# Altium PCB Mojo.PcbDoc
Units mil, origin at the board's own origin, x right, y up, seen from the top; angles counter-clockwise.
Board outline 1000 x 1000 mil, 2 copper layers (Top Layer, Bottom Layer), stack 61.756 mil thick; 20 components, 10 nets, 57 pads, 23 vias.
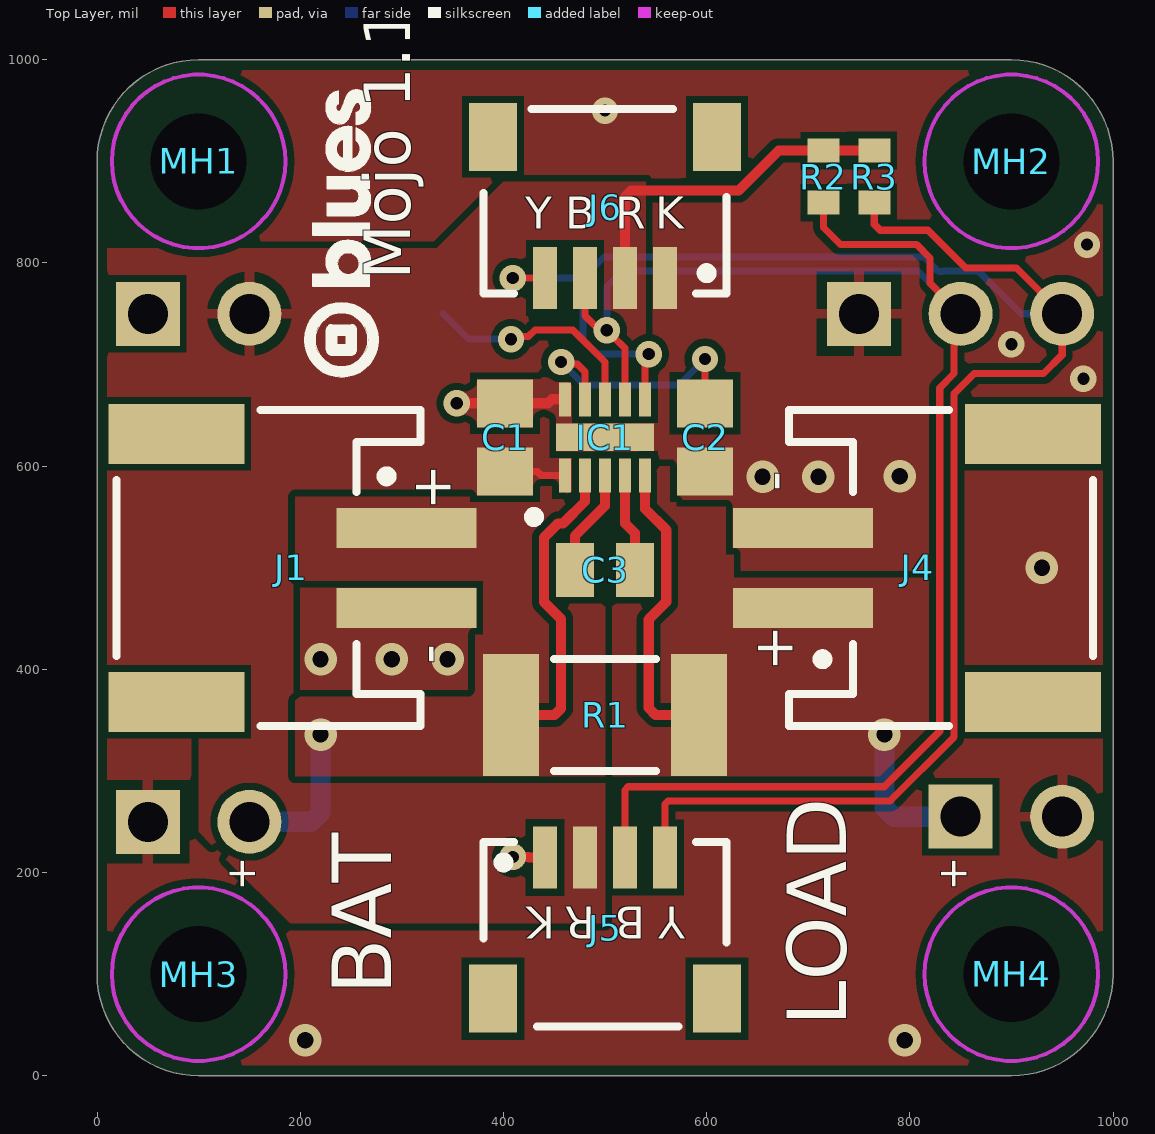
[diagram p0: Top Layer view]
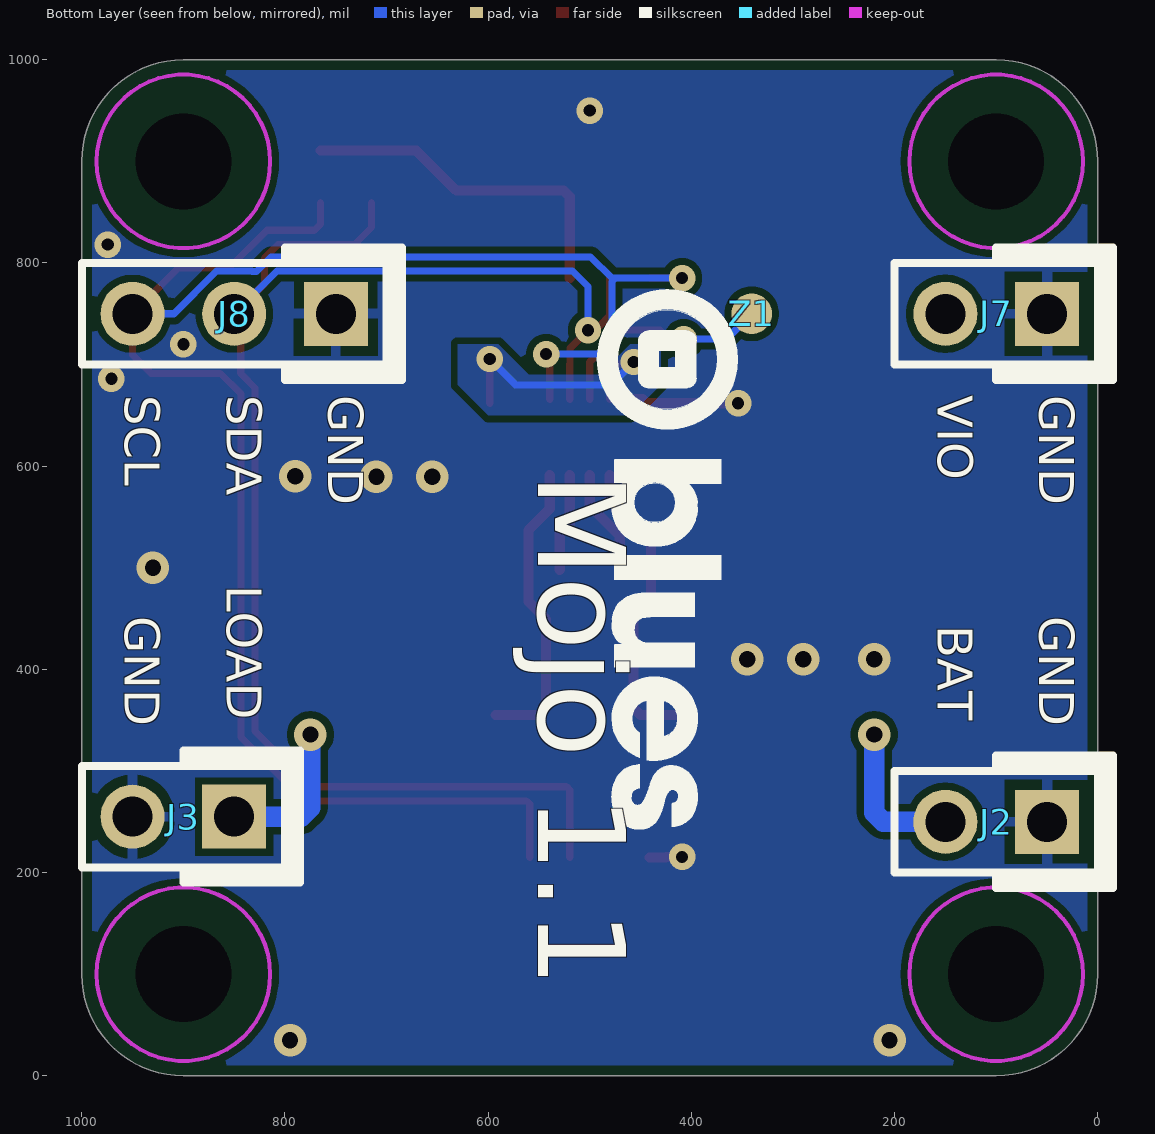
[diagram p1: Bottom Layer view, seen from below]
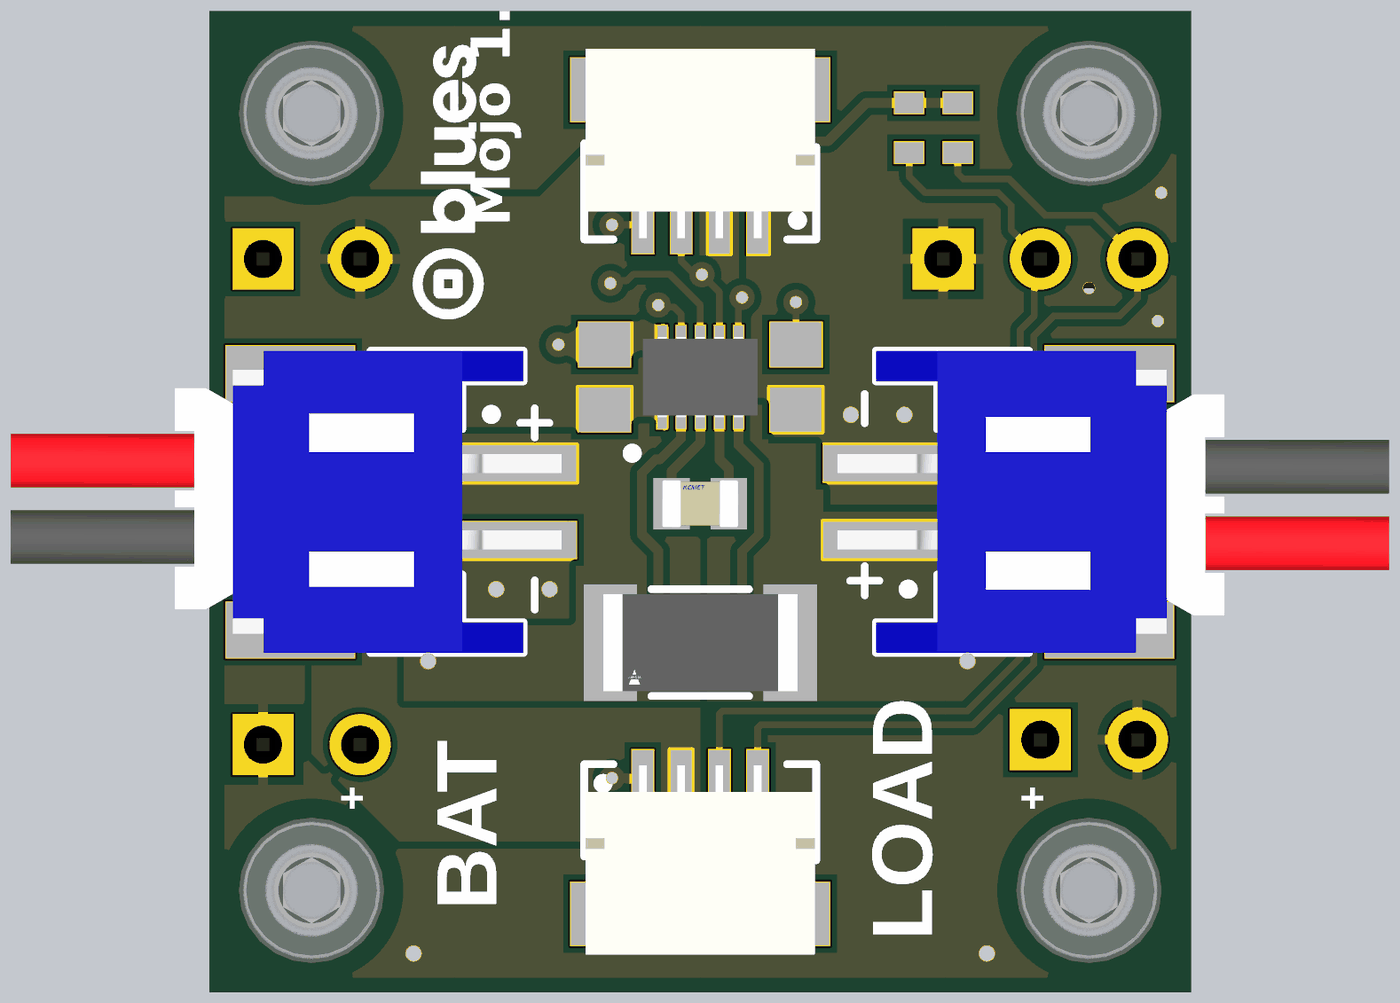
[diagram p2: 3D render of the assembled board from above, using the file's embedded part models]
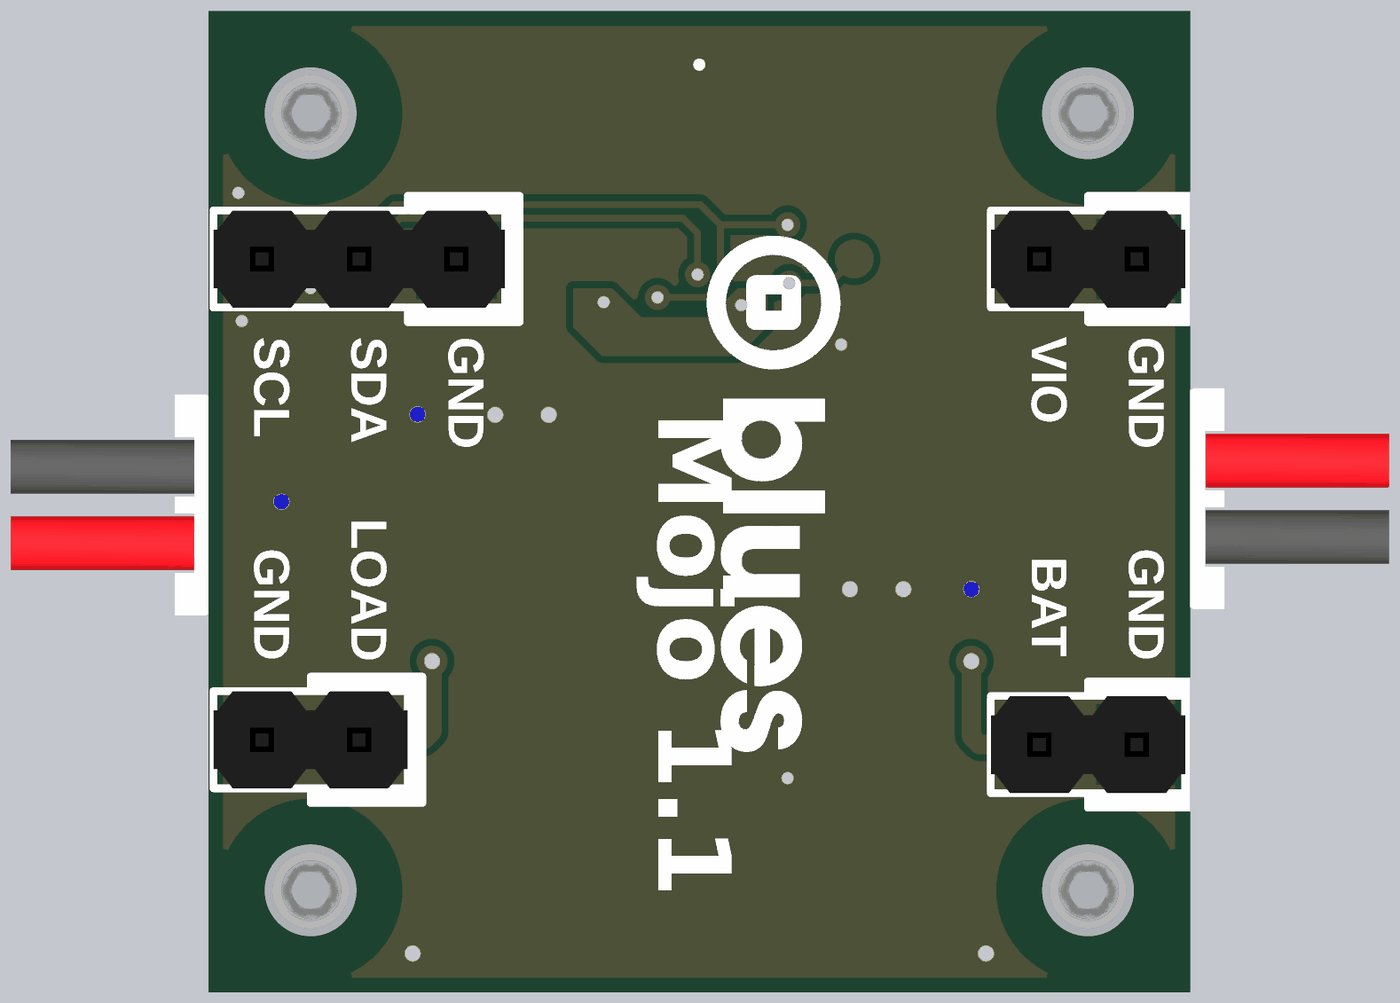
[diagram p3: 3D render of the assembled board from below, using the file's embedded part models]

## Layer stack, top to bottom
Top Solder: solder mask 1, SM-001, Dk 4
Top Layer: signal copper 1.378
Dielectric 1: core 59, Core-043, Dk 4.3
Bottom Layer: signal copper 1.378
Bottom Solder: solder mask 1, SM-001, Dk 4

## Board outline
0,100 ccw(c100,100) 100,0 900,0 ccw(c900,100) 1000,100 1000,900 ccw(c900,900) 900,1000 100,1000 ccw(c100,900) 0,900

## Design rules (kind name [scope] priority, off if disabled: settings)
AcuteAngle [All] p1: minimum=6.00000000000000E+0001 checktracksonly=FALSE
BoardOutlineClearance BoardOutlineClearance_Silkscreen [OnSilkscreen] p1: gap=0 ignorepadtopadclearanceinfootprint=FALSE except(10: Text-OutlineEdge Text-CavityEdge Text-CutoutEdge Text-SplitBarrior Text-SplitContinuation) // Silkscreen can cross board outline, but text should be within the board.
BoardOutlineClearance [All] p2: gap=10 ignorepadtopadclearanceinfootprint=FALSE
Clearance Clearance_via_to_pad [isvia vs ispad] p1: gap=7 ignorepadtopadclearanceinfootprint=FALSE // Via to pad clearance (for escape)
Clearance [All] p2: gap=7 ignorepadtopadclearanceinfootprint=FALSE
HoleSize [All] p1: absolutevalues=TRUE maxlimit=393.7 minlimit=1 maxpercent=80.000 minpercent=20.000
MinimumAnnularRing [All] p1: minimumring=7
MinimumSolderMaskSliver [All] p1: minsoldermaskwidth=3
PasteMaskExpansion [All] p1: expansion=-0.98
PlaneClearance [All] p1: clearance=10
PlaneConnect [All] p1: planeconnectstyle=Relief reliefexpansion=10 reliefentries=4 reliefconductorwidth=10 reliefairgap=10
PolygonConnect [All] p1: thpad.connectstyle=Relief thpad.reliefconductorwidth=10 thpad.reliefentries=4 thpad.polygonreliefangle="90 Angle" thpad.airgapwidth=10 smdpad.connectstyle=Direct smdpad.reliefconductorwidth=10 smdpad.reliefentries=4 smdpad.polygonreliefangle="90 Angle" smdpad.airgapwidth=10 via.connectstyle=Direct via.reliefconductorwidth=10 via.reliefentries=4 via.polygonreliefangle="90 Angle" via.airgapwidth=10
RoomDefinition Mojo [InComponentClass('Mojo')] p1: confinementstyle=ConfineIn formatcopy=TRUE lockcomponents=FALSE outline -235.2,-10.83 1239.8,-10.83 1239.8,1009.17 -235.2,1009.17
RoutingCorners [All] p1: cornerstyle=45-Degree minsetback=50 maxsetback=100
RoutingVias [All] p1: holewidth=11.81 width=23.62 viastyle="Through Hole" minholewidth=7.87 minwidth=15.75 maxholewidth=15.75 maxwidth=31.5 useviatemplates=TRUE viatemplateguid#1={5F6B056E-F8F0-49D9-86D1-57D17891D3C9} viatemplateguid#2={B8950678-3644-47E3-AB67-55393E763CC1} viatemplatename#1=v66h30 viatemplatename#2=v81h41
SMDEntry [All] p1: side=TRUE corner=TRUE anyangle=FALSE
SMDNeckDown [All] p1: percent=95.000
SMDToCorner [All] p1: distance=40000
SMDToPlane [All] p1 off: distance=1500000
SilkToSilkClearance [All] p1: silktosilkclearance=4
SilkToSolderMaskClearance SilkToSolderMaskNoTextOverVias [IsVia or IsPad vs IsText and IsDesignator] p1: minsilkscreentomaskgap=1 clearancetoexposedcopper=TRUE // Avoid placing designator and other text directly over a via
SilkToSolderMaskClearance [IsPad] p2: minsilkscreentomaskgap=4 clearancetoexposedcopper=TRUE // Avoid silkscreen on pad that can lead to solderability issues
SolderMaskExpansion SolderMaskExpansion_via [isvia] p1: expansion=4 istentingtop=TRUE // Mask vias by default
SolderMaskExpansion [All] p2: expansion=2 istentingtop=FALSE
SupplyNets "Schematic Supply Nets_1" [InNet('GND')] p1: voltage=0.000
SupplyNets "Schematic Supply Nets" [InNet('3V3')] p2: voltage=0.000
UnRoutedNet [All] p1: checkbadconnections=TRUE
Width Width_Power [InNetClass('Power')] p1: maxlimit=50 minlimit=10 preferedwidth=30
Width [All] p2: maxlimit=20 minlimit=7 preferedwidth=10 checkconnectedcopper=TRUE
21 further rules are at their usual default settings.

## Classes and differential pairs
net class R3_Nets: 3V3 SCL
net class R2_Nets: 3V3 SDA
net class J8_Nets: GND NetJ8_1 NetJ8_2 SCL SDA
net class J7_Nets: 3V3 GND NetJ7_1 NetJ7_2
net class J6_Nets: 3V3 GND SCL SDA
net class J4_Nets: GND VLOAD
net class J3_Nets: GND VLOAD
net class J2_Nets: GND VBAT
net class J1_Nets: GND VBAT
net class IC1_Nets: 3V3 GND GPIO NetC2_2 NetC3_1 NetC3_2 SCL SDA VBAT VLOAD
net class C3_Nets: NetC3_1 NetC3_2
net class C2_Nets: GND NetC2_2
net class C1_Nets: 3V3 GND
net class Z1_Nets: GPIO
net class R1_Nets: VBAT VLOAD
net class J5_Nets: 3V3 GND NetJ?_1 NetJ?_2 SCL SDA

## Components (designator, comment, footprint, x,y, rotation, side; value= is the part's Value field where it differs from the comment)
C1 "GRM216R61E105KA12D" CAPC2013X70X45NL10T25 401.57,628.43 r270 top
C2 "GRM216R61E105KA12D" CAPC2013X70X45NL10T25 598.43,628.43 r90 top
C3 "C0805C474K5RACTU" FP-C0805C-DN-MFG 500,498.03 r0 top value="0.47 μF"
IC1 "LTC2959IDDB#TRMPBF" SON50P200X300X80-11N-D 500,628.43 r90 top
J1 "20404" BAT-AF-S2B-PH-SM4 168.54,500 r270 top
J2 "Header 2-Pin, 0.100 in" HEADER_AA_002 50,250 r0 bottom
J3 "Header 2-Pin, 0.100 in" HEADER_AA_002 850,255 r0 bottom
J4 "20404" BAT-AF-S2B-PH-SM4 830.44,500 r90 top
J5 "QWIIC SM04B-SRSS-TB(LF)(SN)" QWIIC_SM04B-SRSS 500,134.88 r180 top
J6 "QWIIC SM04B-SRSS-TB(LF)(SN)" QWIIC_SM04B-SRSS 500,865.12 r0 top
J7 "Header 2-Pin, 0.100 in" HEADER_AA_002 50,750 r0 bottom
J8 "Header 3-Pin, 0.100 in" HEADER_AA_003 750,750 r0 bottom
MH1 "M2" HOLE_2MM 100,900 r0 top
MH2 "M2" HOLE_2MM 900,900 r0 top
MH3 "M2" HOLE_2MM 100,100 r0 top
MH4 "M2" HOLE_2MM 900,100 r0 top
R1 "WSL2010R2500FEA" FP-WSL2010-0_508-MFG 500,355 r180 top
R2 "RC0603FR-0722KL" RESC1608X55X25LL10T15 715,885 r90 top
R3 "RC0603FR-0722KL" RESC1608X55X25LL10T15 765,885 r90 top
Z1 "Test Point" testp_40pad 340.63,750 r180 bottom

## Footprints (in the part's own frame and the unit in brackets; to place one, negate y for a bottom-side part, rotate by r counter-clockwise, add the part's x,y. Pads: shape width x height; smd on the part's side, far side on the other; paste and mask are expansions set on the pad)
BAT-AF-S2B-PH-SM4 [mm] "Battery Connector PH 2POS Adafruit style (JST-S2B-PH-SM4-TB(LF)(SN)_V_1)"
  rect 1x3.5 smd: 1(-1,3.45) 2(1,3.45)
  rect 1.5x3.4 smd: MP1(-3.35,-2.3) MP2(3.35,-2.3)
  silkscreen extent -3.95,-3.8 3.95,3.8, body extent -3.95,-9.61 3.95,4.8, height 5.6
CAPC2013X70X45NL10T25 [mm] "Chip Capacitor, 2-Leads, Body 2.00x1.25mm, IPC Medium Density"
  rect 1.2x1.4 smd: 1(-0.85,0) 2(0.85,0)
  body extent -1.05,-0.67 1.05,0.68, height 0.7
FP-C0805C-DN-MFG [mm]
  rect 0.95x1.35 smd paste+0 mask+0: 1(-0.75,0) 2(0.75,0)
  body extent -1.4,-0.85 1.4,0.85, height 0.25
FP-WSL2010-0_508-MFG [mm]
  rect 1.4x3.05 smd paste+0 mask+0: 1(-2.35,0) 2(2.35,0)
  silkscreen extent -1.28,-1.4 1.27,1.4, body extent -3.15,-1.63 3.15,1.63, height 0.25
HEADER_AA_002 [mm] "Header, 0.100\" pitch, type AA. 2POS"
  rect 1.6x1.6 hole 1: 1(0,0)
  round 1.6 hole 1: 2(2.54,0)
  silkscreen extent -1.65,-1.65 3.81,1.65, body extent -1.27,-1.27 3.81,1.27, height 8.34
HEADER_AA_003 [mm] "Header, 0.100\" pitch, type AA. 3POS"
  rect 1.6x1.6 hole 1: 1(0,0)
  round 1.6 hole 1: 2(2.54,0) 3(5.08,0)
  silkscreen extent -1.65,-1.65 6.35,1.65, body extent -1.27,-1.27 6.35,1.27, height 8.34
HOLE_2MM [mm] "Bare Hole M2 - Normal Fit (2.4 mm)"
  round 0 hole 2.4 unplated: MH(0,0)
  Keep-Out Layer circle w0.1: c0,0 r2.17
  Keep-Out Layer region: 0,-2.17 -0.83,-2.005 -1.534,-1.534 -2.005,-0.83 -2.17,0 -2.17,0 -2.005,0.83 -1.534,1.534 -0.83,2.005 0,2.17 0,2.17 0.83,2.005 1.534,1.534 2.005,0.83 2.17,0 2.17,0 2.005,-0.83 1.534,-1.534 0.83,-2.005 0,-2.17
  body extent -1.9,-1.9 1.9,1.9, height 2
QWIIC_SM04B-SRSS [mm] "QWIIC Connector Pin Order"
  rect 0.6x1.55 smd: 1(1.5,-2.032) 2(0.5,-2.032) 3(-0.5,-2.032) 4(-1.5,-2.032)
  rect 1.2x1.7 smd: M(-2.8,1.5) M(2.8,1.5)
  silkscreen extent -3.03,-2.41 3.03,2.2, body extent -3,-2.38 3,2.57, height 2.95
RESC1608X55X25LL10T15 [mm] "Chip Resistor, 2-Leads, Body 1.70x0.90mm, IPC High Density"
  rect 0.6x0.8 smd: 1(-0.65,0) 2(0.65,0)
  body extent -0.85,-0.45 0.85,0.45, height 0.55
SON50P200X300X80-11N-D [mm]
  rect 0.85x0.3 smd: 1(-0.95,1) 2(-0.95,0.5) 3(-0.95,0) 4(-0.95,-0.5) 5(-0.95,-1) 6(0.95,-1) 7(0.95,-0.5) 8(0.95,0) 9(0.95,0.5) 10(0.95,1)
  rect 0.69x2.44 smd paste-2539.97 mask+0.051: 11(0,0)
  silkscreen extent -2.12,1.65 -1.87,1.9, body extent -1.05,-1.5 1.05,1.5, height 0.8
testp_40pad [mil] "Test Point, 40 mil pad. One side"
  round 40 smd paste-99999 mask+2: 1(0,0)

## Part data
C1 C2: library part CMP-2007-00957-1, Capacitance=1uF, Case/Package=0805, Dielectric=X5R, Manufacturer=Murata, Supplier Part Number 1=490-1700-1-ND, Tolerance=10%, Voltage=25V, Manufacturer Part Number=GRM216R61E105KA12D, Part Number=GRM216R61E105KA12D, Supplier 1=Digi-Key
C3: library part CMP-2007-03659-2, "CAP CER 0.47UF 50V 10% X7R 0805", Capacitance="0.47 μF", Manufacturer=KEMET, Package=C0805C-DN, Temperature="-55°C to +125°C", Temperature Characteristic=X7R, Temperature Coefficient=30ppm/°C, Temperature Range High=+125°C, Temperature Range Low=-55°C, Tolerance=0.1, Voltage Rating="50 V", Automotive=No, Category=Cap, ComponentLink2Description=Datasheet, ComponentLink2URL=https://content.kemet.com/datasheets/KEM_C1003_C0G_SMD.pdf, Device Class L1="Passive Components", Device Class L2=Capacitors, Device Class L3="Ceramic Capacitors", Digikey Description="CAP CER 0.47UF 50V 10% X7R 0805", Height=0.88mm, Ipc Land Pattern Name=CAPC200125X78, Lead Free=Yes, Manufacturer Part Number=C0805C474K5RACTU, Material=Ceramic, Mouser Description="0805 C 470nF Ceramic Multilayer Capacitor, 50 VDC, +125degC, X7R Dielec, +/-10%", Octopart=https://octopart.com/c0805c474k5ractu-kemet-144543, RoHS=TRUE
IC1: "Ultra-low-power Battery Gas Gaug", Manufacturer="Analog Devices", Mouser Part Number=584-LTC2959IDDBTRMPB, Supplier Part Number 1=505-LTC2959IDDB#TRMPBFCT-ND, Category="Battery Management", ComponentLink1Description=Datasheet, ComponentLink1URL=https://www.analog.com/media/en/technical-documentation/data-sheets/ltc2959.pdf, Datasheet Link=https://www.analog.com/LTC2959/datasheet, Height=0.8mm, Manufacturer Part Number=LTC2959IDDB#TRMPBF, Manufacturer_Name="Analog Devices", Manufacturer_Part_Number=LTC2959IDDB#TRMPBF, Mouser Price/Stock=https://www.mouser.co.uk/ProductDetail/Analog-Devices/LTC2959IDDBTRMPBF?qs=pUKx8fyJudDXTmMT1kM1kQ%3D%3D, Pricing 1="1=9.13, 10=8.252, 25=7.868, 100=6.8316, 250=6.5246 (USD)", RoHS=No, Stock 1=2988, Supplier 1=Digikey
J1 J4: library part BAT-PH-ADAFRUIT-SMT-RA, "Battery Connector PH-2POS wired for Adafruit style packs.  SMD RA 4UCON 20404 (similar to JST S2B-PH-SM4-TB(LF)(SN))", Manufacturer=4UCON, ComponentLink1Description=http://www.farnell.com/datasheets/1699381.pdf, ComponentLink1URL=http://www.farnell.com/datasheets/1699381.pdf, Cross 1="Adafruit 1769", Cross 2="JST S2B-PH-SM4-TB(LF)(SN) (tight fit)", Manufacturer Part Number=20404, Mounting Type=SMD
J2 J3 J7: library part HEADER_AA_2, "Header 2-Pin, 0.100 inch (0.230 inch head)", Manufacturer=Sullins, Manufacturer Part Number=PEC02SAAN, Function 1="Function 1", Function 2="Function 2", Mount="Through Hole", Number of Positions=2, Number of Rows=1
J5 J6: library part QWIIC_SM04B-SRSS, "CONN HEADER SH 4POS SIDE 1MM TIN QWIIC pinout", Color=Natural, Contact Resistance=40mR, Housing Color=Beige, Manufacturer=JST, Manufacturer Part Number=SM04B-SRSS-TB(LF)(SN), Max Current Rating=1A, Max Operating Temperature=85°C, Max Voltage Rating (AC)=50V, Min Operating Temperature=-25°C, Supplier Part Number 1=455-1804-1-ND, Category=Connectors, ComponentLink1Description=https://datasheet.ciiva.com/26894/getdatasheetpartid-640736-26894676.pdf?src-supplier=Verical, ComponentLink1URL=https://datasheet.ciiva.com/26894/getdatasheetpartid-640736-26894676.pdf?src-supplier=Verical, ComponentLink2Description=https://datasheet.ciiva.com/26894/getdatasheetpartid-499363-26894945.pdf?src-supplier=Verical, ComponentLink2URL=https://datasheet.ciiva.com/26894/getdatasheetpartid-499363-26894945.pdf?src-supplier=Verical, ComponentLink3Description=https://datasheet.ciiva.com/16487/jstsm04b-srss-tb-lf-sn-16487222.pdf?src-supplier=Future+Electronics, ComponentLink3URL=https://datasheet.ciiva.com/16487/jstsm04b-srss-tb-lf-sn-16487222.pdf?src-supplier=Future+Electronics, Connector Type="Male Pin", Contact Material="Copper Alloy", Contact Plating=Tin,Copper, Depth=4.95mm, Housing Material=Polyamide, Lead Free="Lead Free", Length=6mm, Max Voltage Rating (DC)=50V, Mount="Surface Mount", Number of Contacts=4, Number of Positions=4, Number of Rows=1, Orientation="Right Angle", Packaging="Tape and Reel", Pitch=0.039inch, Pricing 1="1=0.57000, 10=0.49300, 100=0.40630, 500=0.35328, 1000=0.29146 (USD)", RoHS=Yes, Supplier 1=Digi-Key, Termination=Solder
J8: library part HEADER_AA_3, "Header 3-Pin, 0.100 inch (0.230 inch head)", Manufacturer=Sullins, Manufacturer Part Number=PEC03SAAN, Function 1="Function 1", Function 2="Function 2", Mount="Through Hole", Number of Positions=3, Number of Rows=1
MH1 MH2 MH3 MH4: library part "Bare Hole M2", "Bare Hole, M2"
R1: library part RES_2020_0R250, "0R250 Metal Strp 2010 1% 1/2W 75Ppm/ C WSL2010R2500FEA", Case Code (Imperial)=2010, Case Code (Metric)=5025, Manufacturer="Vishay Dale", Max Operating Temperature=170°C, Max Power Dissipation=500mW, Min Operating Temperature=-65°C, Resistance=250mΩ, Temperature Coefficient=75ppm/°C, Tolerance=1%, Voltage Rating=150mV, Case/Package=2010, Composition="Metal Element", Contact Plating=Tin, Depth=2.54mm, Features="Moisture Resistant", Height=635µm, Lead Free="Lead Free", Length=5.08mm, Manufacturer Part Number=WSL2010R2500FEA, Military Standard=Not, Mount="Surface Mount", Number of Pins=2, Number of Terminations=2, Packaging="Cut Tape", Power Rating=500mW, Radiation Hardening=No, REACH SVHC="No SVHC", RoHS=Compliant, Schedule B="8533210045, 8533210045", Termination=SMD/SMT, Voltage Rating (AC)=150mV, Voltage Rating (DC)=150mV, Weight=38.895546mg, Width=2.54mm
R2 R3: library part CMP-1012-00659-3, "Chip Resistor, 22 KOhm, +/- 1%, 0.1 W, -55 to 155 degC, 0603 (1608 Metric), RoHS, Tape and Reel", Case/Package=Radial, Current Rating="290 mA", Max Operating Temperature=105degC, Min Operating Temperature=-55degC, Package Quantity=100, Resistance="2.9 Ohm", Tolerance=10%, ComponentLink1Description="Manufacturer URL", ComponentLink1URL=http://www.yageo.com/, ComponentLink2Description=Datasheet, ComponentLink2URL=http://www.yageo.com/documents/recent/PYu-RC_Group_51_RoHS_L_04.pdf, DatasheetVersion="Rev. 4, 02/2016", Diameter="8.5 mm", Height="11 mm", Lead Pitch="5 mm", Mount="Through Hole", PackageDescription="2-Pin Surface Mount Device, Body 1.6 x 0.8 mm", PackageReference=0603, Packaging=Bulk, Pins=2, Radiation Hardening=No, REACH SVHC="No SVHC", RoHSCompliant=True, Shielding=Unshielded
Z1: library part test_pt, "Test point"

## Via types
v1: diameter 26, hole 12, Top Layer to Bottom Layer, tented both sides, 12 vias
v2: diameter 32, hole 16, Top Layer to Bottom Layer, tented both sides, 11 vias

## Nets (pads, with @x,y where several pads share a name; then routed paths per layer and width w, separated by ;. In a path a pad name is that pad's centre, name@x,y a point inside that pad or via, vN(x,y) a via of type N, cw(c..) or ccw(c..) an arc to the next point about the centre after c; other vN are vias at no path point)
3V3: C1.2 IC1.1 J5.2 J6.2 J7.2 R2.2 R3.2 | length 405
  Top Layer w7: C1.2 433.13,594.96 437.07,591.02 IC1.1
  Top Layer w10: J6.2 519.68,865.31 525.59,871.22 631.34,871.22 670.71,910.59 R2.2 R3.2
GND: C1.1 C2.1 IC1.10 IC1.11 J1.2 J2.1 J3.2 J4.2 J5.1 J6.1 J7.1 J8.1 | length 140.3
  Top Layer w10: v1(354.02,661.89) C1.1 443.9,661.89 447.83,665.83 IC1.10 ; v1(409.13,215.49) 424.52,215.49 425.13,214.88 J5.1
  other v1: 970.87,686.1 900,720 974.36,818.05 500,950
  other v2: 205,35 795,35 220,410 290,410 345,410 930,500 655,589.54 710,589.54 790,590
GPIO: IC1.8 Z1.1 | length 223.2
  Top Layer w7: v1(407.48,725) 410.09,727.61 424.48,727.61 430.98,734.11 468.29,734.11 500,702.4 IC1.8
  Bottom Layer w7: Z1.1 365.63,725 v1(407.48,725)
NetC2_2: C2.2 IC1.9 | length 259.7
  Top Layer w7: v1(456.82,702.56) 458.78,700.6 472.64,700.6 480.32,692.92 IC1.9 ; C2.2 v1(598.43,705.51)
  Bottom Layer w7: v1(456.82,702.56) 479.37,680 572.91,680 v1(598.43,705.51)
NetC3_1: C3.1 IC1.3 | length 105.2
  Top Layer w10: C3.1 470.47,531.44 500,560.97 IC1.3
NetC3_2: C3.2 IC1.4 | length 97.1
  Top Layer w10: IC1.4 519.68,543.83 529.53,533.99 C3.2
SCL: IC1.6 J5.4 J6.4 J8.3 R3.1 | length 1891.4
  Top Layer w7: v1(409.13,785.12) J6.4 ; IC1.6 539.37,706.74 v1(543,710.37) ; J5.4 559.05,267.39 562.13,270.46 780.58,270.46 843.4,333.27 843.4,386.87 843.4,671.27 863.36,691.24 931.61,691.24 950,709.63 J8.3 905,795 855,795 817.74,832.26 770.82,832.26 765,838.08 R3.1
  Bottom Layer w7: v1(409.13,785.12) 474.88,785.12 ; v1(543,710.37) 492.03,710.37 478.26,724.14 478.26,781.74 474.88,785.12 ; J8.3 909.39,750 867.4,792 832.6,792 832.38,791.77 828.03,791.77 813.8,806 499.14,806 478.26,785.12 474.88,785.12
SDA: IC1.7 J5.3 J6.3 J8.2 R2.1 | length 1590.9
  Top Layer w7: J6.3 480.31,748.08 490.88,737.51 492.99,737.51 500.02,730.48 500.02,727.67 507.97,727.67 519.5,716.13 519.5,700.64 519.68,700.46 IC1.7 ; v1@497.77,729.88 v1(501.76,733.87) ; J5.3 519.68,281.39 522.76,284.46 774.78,284.46 829.4,339.07 829.4,677.07 843.57,691.24 843.57,743.57 J8.2 820,780 820,805 806.74,818.26 731.74,818.26 715,835 R2.1
  Bottom Layer w7: v1(501.76,733.87) 501.76,776.88 516.88,792 808,792 J8.2
VBAT: IC1.2 J1.1 J2.2 R1.2 | length 458.8
  Top Layer w10: R1.2 450,355 456.82,361.82 456.82,449.44 439.77,466.49 439.77,529.58 453.95,543.76 458.74,543.76 480.31,565.33 IC1.2
  Bottom Layer w20: J2.2 211.21,250 220,258.79 v2(220,335.87)
VLOAD: IC1.5 J3.1 J4.1 R1.1 | length 447.9
  Top Layer w10: IC1.5 539.37,558.18 560.23,537.32 560.23,466.49 543,449.26 543,362 550,355 R1.1
  Bottom Layer w20: v2(775,335.87) 775,263.79 783.79,255 J3.1
pads on no net: J1.MP1 J1.MP2 J4.MP1 J4.MP2 J5.M J6.M MH1.MH MH2.MH MH3.MH MH4.MH

## Polygon pours and split planes (outlines as drawn)
GND on Bottom Layer "GND_L02_P009" (solid, remove dead copper, pour order 9): 0,100 ccw(c100,100) 100,0 900,0 ccw(c900,100) 1000,100 1000,900 ccw(c900,900) 900,1000 100,1000 ccw(c100,900) 0,900
NetC2_2 on Bottom Layer "NONET_L01_P-001" (solid, pour order 8): 430,680 460,650 600,650 630,680 630,720 590,720 560,690 490,690 460,720 430,720
GND on Top Layer "GND_L01_P011" (solid, pour order 11): -11.74,0.06 1085.9,0.06 1088.26,-2.3 1088.26,997.7 -11.74,997.7
VLOAD on Top Layer "VLOAD_L01_P010" (solid, pour order 10): 500,294.96 599.92,294.96 818.81,294.96 818.81,490 626.73,490 626.73,560 570,560 570,600 500,600
GND on Top Layer "GND_L01_P013" (solid, remove dead copper, pour order 13): 843.57,665.83 1000,665.83 1000,900 900,900 900,811.55 844.22,755.78
3V3 on Top Layer "3V3_L01_P007" (solid, pour order 7): 100,240 100,345 0,345 0,814.57 334.57,814.57 400,880 540,880 540,680 500,640.63 500,150 190,150
VBAT on Top Layer "VBAT_L01_P006" (solid, pour order 6): 195,570 195,294.96 394.96,294.96 500,294.96 500,600 430,600 430,570
GND on Top Layer "NONET_L01_P-001" (solid, pour order 12): 800,519.22 641.73,519.22 641.73,619.54 800,619.54
GND on Top Layer "NONET_L01_P-001" (solid, pour order 5): 200,480.31 365,480.31 365,380 200,380

## Silkscreen, mask and mechanical layers (free items; w line width, h text height)
Top Overlay:
  drawing of 493 lines, arcs and shapes, not listed
  text "Mojo 1.1" at 323.44,783.72 h78.74 r90
  text "+" at 165.75,182 h50 r90
  text "+" at 865.75,182 h50 r90
  text "BAT" at 308.71,79.98 h100 r90
  text "LOAD" at 756.77,48.79 h100 r90
Bottom Overlay:
  drawing of 493 lines, arcs and shapes, not listed
  text "GND" at 68.88,670 h59.06 r90
  text "VIO" at 168.88,670 h59.06 r90
  text "GND" at 768.88,670 h59.06 r90
  text "SDA" at 868.86,670 h59.06 r90
  text "SCL" at 968.86,670 h59.06 r90
  text "Mojo 1.1" at 579.3,593.56 h148.08 r90
  text "LOAD" at 868.88,482.86 h59.06 r90
  text "GND" at 68.88,452.12 h59.06 r90
  text "GND" at 968.88,452.12 h59.06 r90
  text "BAT" at 168.89,443.55 h59.06 r90
Board Outline:
  the board outline again, w10
Fab Notes:
  drawing of 225 lines, arcs and shapes, not listed
  text "Layer" at 6887.86,5230.32 h47.24
  text "Name" at 7158.13,5230.32 h47.24
  text "Material" at 7979.46,5230.32 h47.24
  text "Thickness" at 8401.78,5230.32 h47.24
  text "Constant" at 8804.98,5230.32 h47.24
  text "Gerber" at 9189.06,5230.32 h47.24
  text "Board Layer Stack" at 9491.49,5230.32 h47.24
  text "Top Overlay" at 7158.13,5135.83 h47.24
  text "GTO" at 9189.06,5135.83 h47.24
  text "Top Solder" at 7158.13,5041.34 h47.24
  text "SM-001" at 7979.46,5041.34 h47.24
  text "0.025mm" at 8401.78,5041.34 h47.24
  text "4" at 8804.98,5041.34 h47.24
  text "GTS" at 9189.06,5041.34 h47.24
  text "Top Surface Finish" at 7158.13,4946.85 h47.24
  text "PbSn" at 7979.46,4946.85 h47.24
  text "0.020mm" at 8401.78,4946.85 h47.24
  text "1" at 6887.86,4852.36 h47.24
  text "Top Layer" at 7158.13,4852.36 h47.24
  text "CF-004" at 7979.46,4852.36 h47.24
  text "0.035mm" at 8401.78,4852.36 h47.24
  text "GTL" at 9189.06,4852.36 h47.24
  text "Dielectric 1" at 7158.13,4757.87 h47.24
  text "Core-043" at 7979.46,4757.87 h47.24
  text "1.499mm" at 8401.78,4757.87 h47.24
  text "4.3" at 8804.98,4757.87 h47.24
  text "2" at 6887.86,4663.39 h47.24
  text "Bottom Layer" at 7158.13,4663.39 h47.24
  text "CF-004" at 7979.46,4663.39 h47.24
  text "0.035mm" at 8401.78,4663.39 h47.24
  text "GBL" at 9189.06,4663.39 h47.24
  text "Bottom Surface Finish" at 7158.13,4568.9 h47.24
  text "PbSn" at 7979.46,4568.9 h47.24
  text "0.020mm" at 8401.78,4568.9 h47.24
  text "Bottom Solder" at 7158.13,4474.41 h47.24
  text "SM-001" at 7979.46,4474.41 h47.24
  text "0.025mm" at 8401.78,4474.41 h47.24
  text "4" at 8804.98,4474.41 h47.24
  text "GBS" at 9189.06,4474.41 h47.24
  text "Bottom Overlay" at 7158.13,4379.92 h47.24
  text "GBO" at 9189.06,4379.92 h47.24
  text "Total board thickness:" at 6887.86,4285.43 h47.24
  text "1.659mm" at 8401.78,4285.43 h47.24
  text "Client Name: '.ClientID'" at 7537.4,3846.46 h95.09
  text "Project Name: '.ProjectID'" at 7537.4,3748.03 h95.09
  text "File: '.Pcb_File_Name_No_Path'" at 7537.4,3551.18 h95.09
  text "Rev: '.ProjectRevision'" at 7537.4,3452.76 h95.09
  text "NOTES:" at 7537.4,3255.91 h95.09
  text "UNLESS OTHERWISE SPECIFIED:" at 7537.4,3157.48 h95.09
  text "1. Board Dimension: 25.40mm x 25.40mm" at 7537.4,3059.06 h95.09
  text "2. Total Thickness: 1.6 mm +/- 10%" at 7537.4,2960.63 h95.09
  text "3. Board Material: FR-4, Tg130+" at 7537.4,2862.2 h95.09
  text "4. Copper Layers: 2, Weight: 1 oz" at 7537.4,2763.78 h95.09
  text "5. Soldermask Layers: Both, Color: Black (LPI preferred)" at 7537.4,2665.35 h95.09
  text "6. Legend Layers: Both, Color: White. (LPI preferred)" at 7537.4,2566.93 h95.09
  text "7. Finish: HASL" at 7537.4,2468.5 h95.09
  text "8. Fabricate PCB According to IPC-6012 Class 1" at 7537.4,2370.08 h95.09
  text "9. 1.5 mm (0.06\") maximum radius on any inside corner." at 7537.4,2271.65 h95.09
  text "SPECIAL REQUIREMENTS:" at 7537.4,2074.8 h95.09
  text "10. A SMD test pad on bottom is normally tented (1 place)" at 7537.4,1976.38 h95.09
  text "VENDOR NOTES:" at 7537.4,1779.53 h95.09
  text "11. Route board shape and any cut outs per Board Outline layer." at 7537.4,1681.1 h95.09
  text "12. Place added marking (Job Number, Date Code, Mfg ID, etc) on bottom" at 7537.4,1582.68 h95.09
  text "13. Boards must pass visual inspection per IPC-A-600 Class 1" at 7537.4,1484.25 h95.09
  text "Engineering Contact: joseph@toybuilderlabs.com" at 7537.4,1188.98 h95.09
Drawing Sheet:
  drawing of 23 lines, arcs and shapes, not listed
  text "'.VersionControl_RevNumber'" at 10047.24,-342.52 h55
Drill Drawing:
  circle w5.91: c-233.44,7732.94 r26.25
  lines w5.91: -259.68,7483.6 -246.56,7483.6 -233.44,7470.47 -220.31,7483.6 -207.19,7483.6 -220.31,7496.72 -207.19,7509.84 -220.31,7509.84 -233.44,7522.97 -246.56,7509.84 -259.68,7509.84 -246.56,7496.72 -259.68,7483.6 ; -259.68,7641.08 -207.19,7641.08 -233.44,7588.58 -259.68,7641.08 ; -259.68,7824.8 -207.19,7824.8 -207.19,7877.3 -259.68,7877.3 -259.68,7824.8
  lines w7.87: -306.15,7435.04 8414.96,7435.04 ; -306.15,7907.48 8414.96,7907.48 ; 83.29,7316.93 83.29,8025.59 ; 829.94,7316.93 829.94,8025.59 ; 1136.17,7316.93 1136.17,8025.59 ; 1593.82,7316.93 1593.82,8025.59 ; 1936.28,7316.93 1936.28,8025.59 ; 2902.91,7316.93 2902.91,8025.59 ; 3283.37,7316.93 3283.37,8025.59 ; 3782.58,7316.93 3782.58,8025.59 ; 4204.6,7316.93 4204.6,8025.59 ; 5390.75,7316.93 5390.75,8025.59 ; 6197.12,7316.93 6197.12,8025.59 ; 7003.49,7316.93 7003.49,8025.59 ; 7529.7,7316.93 7529.7,8025.59 ; -306.15,7316.93 8414.96,7316.93 8414.96,8025.59 -306.15,8025.59 -306.15,7316.93
  text "Symbol" at -235.28,7942.91 h56.69
  text "Hole Size" at 118.72,7942.91 h56.69
  text "Plated" at 865.37,7942.91 h56.69
  text "Hole Type" at 1171.6,7942.91 h56.69
  text "Count" at 1629.25,7942.91 h56.69
  text "Drill Layer Pair" at 1971.72,7942.91 h56.69
  text "Via/Pad" at 2938.34,7942.91 h56.69
  text "Pad Shape" at 3318.8,7942.91 h56.69
  text "Template" at 3818.01,7942.91 h56.69
  text "Description" at 4240.03,7942.91 h56.69
  text "Hole Tolerance (+)" at 5426.19,7942.91 h56.69
  text "Hole Tolerance (-)" at 6232.56,7942.91 h56.69
  text "Hole Length" at 7038.93,7942.91 h56.69
  text "Routed Path Length" at 7565.13,7942.91 h56.69
  text "0.305mm (12.00mil)" at 118.72,7824.8 h47.24
  text "PTH" at 865.37,7824.8 h47.24
  text "Round" at 1171.6,7824.8 h47.24
  text "12" at 1629.25,7824.8 h47.24
  text "Top Layer - Bottom Layer" at 1971.72,7824.8 h47.24
  text "Via" at 2938.34,7824.8 h47.24
  text "Rounded" at 3318.8,7824.8 h47.24
  text "v66h30" at 3818.01,7824.8 h47.24
  text "Signal via 12mil, 26 mil" at 4240.03,7824.8 h47.24
  text "-" at 7038.93,7824.8 h47.24
  text "-" at 7565.13,7824.8 h47.24
  text "0.406mm (16.00mil)" at 118.72,7706.69 h47.24
  text "PTH" at 865.37,7706.69 h47.24
  text "Round" at 1171.6,7706.69 h47.24
  text "11" at 1629.25,7706.69 h47.24
  text "Top Layer - Bottom Layer" at 1971.72,7706.69 h47.24
  text "Via" at 2938.34,7706.69 h47.24
  text "Rounded" at 3318.8,7706.69 h47.24
  text "v81h41" at 3818.01,7706.69 h47.24
  text "Medium power via, 16 mil, 32 mil" at 4240.03,7706.69 h47.24
  text "-" at 7038.93,7706.69 h47.24
  text "-" at 7565.13,7706.69 h47.24
  text "1.000mm (39.37mil)" at 118.72,7588.58 h47.24
  text "PTH" at 865.37,7588.58 h47.24
  text "Round" at 1171.6,7588.58 h47.24
  text "9" at 1629.25,7588.58 h47.24
  text "Top Layer - Bottom Layer" at 1971.72,7588.58 h47.24
  text "Pad" at 2938.34,7588.58 h47.24
  text "(Mixed)" at 3318.8,7588.58 h47.24
  text "(Mixed)" at 3818.01,7588.58 h47.24
  text "-" at 7038.93,7588.58 h47.24
  text "-" at 7565.13,7588.58 h47.24
  text "2.400mm (94.49mil)" at 118.72,7470.47 h47.24
  text "NPTH" at 865.37,7470.47 h47.24
  text "Round" at 1171.6,7470.47 h47.24
  text "4" at 1629.25,7470.47 h47.24
  text "Top Layer - Bottom Layer" at 1971.72,7470.47 h47.24
  text "Pad" at 2938.34,7470.47 h47.24
  text "Rounded" at 3318.8,7470.47 h47.24
  text "c0hn240" at 3818.01,7470.47 h47.24
  text "-" at 7038.93,7470.47 h47.24
  text "-" at 7565.13,7470.47 h47.24
  text "36 Total" at 1629.25,7352.36 h47.24
LayerID:
  text "'.ProjectID'" at 91.34,-258.03 h100
  text "'.Printout_Name'" at 2355.12,-258.03 h100
  text ".ProjectRevision" at 91.34,-356.46 h100
  text "'.Plot_File_Name'" at 2355.12,-358.03 h100

## Dimensions
900,0 to 900,1000 on Fab Notes
0,100 to 1000,100 on Fab Notes
350,785.12 to 389.76,1375 on Fab Notes

## Text inside footprints (layer, text, board x,y; h text height)
J1: Top Overlay "-" at 314.22,424.54 h39.37 r270; Top Overlay "+" at 314.22,601.7 h39.37 r270
J4: Top Overlay "-" at 684.77,575.46 h39.37 r90; Top Overlay "+" at 684.77,398.3 h39.37 r90
J5: Top Overlay "K" at 450.79,166.37 h31.5 r180; Top Overlay "R" at 490.16,166.37 h31.5 r180; Top Overlay "B" at 539.37,166.37 h31.5 r180; Top Overlay "Y" at 578.74,166.37 h31.5 r180
J6: Top Overlay "B" at 460.63,833.63 h31.5; Top Overlay "K" at 549.21,833.63 h31.5; Top Overlay "Y" at 421.26,833.63 h31.5; Top Overlay "R" at 509.84,833.63 h31.5